# EAGLE board TSOC-FTDI-BASE-1-0 (EAGLE 6.6.0)
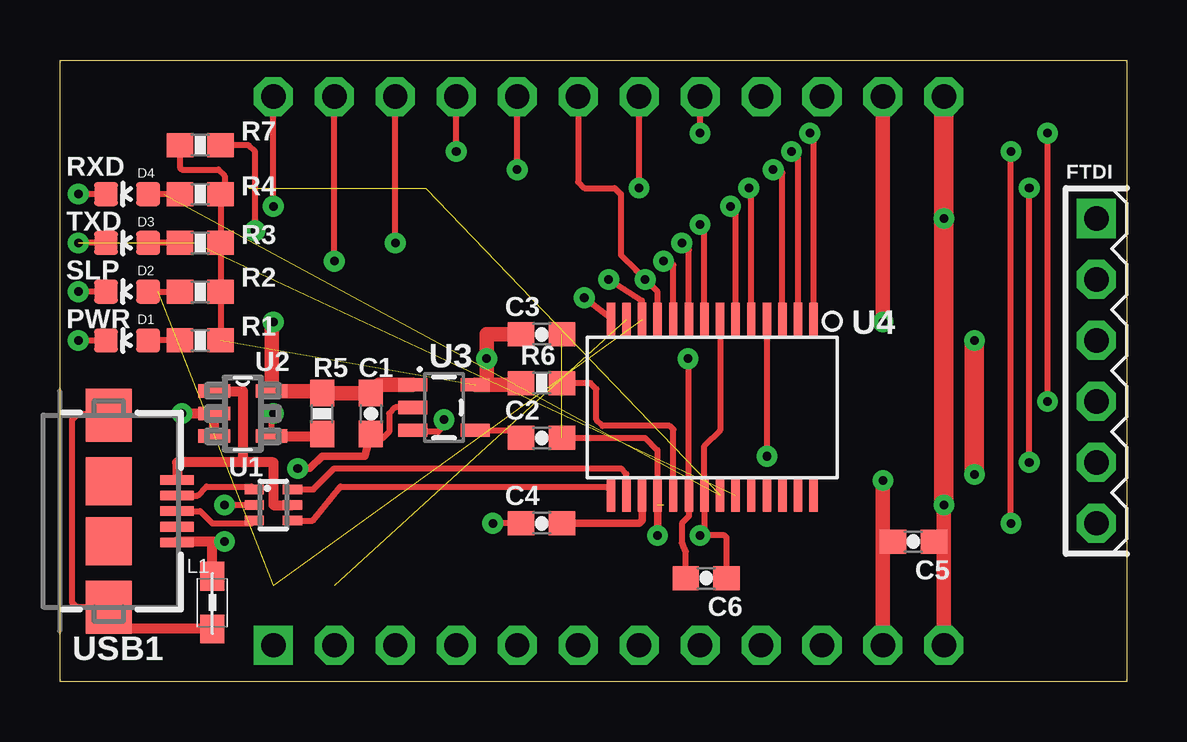
[diagram p0: board, top side]
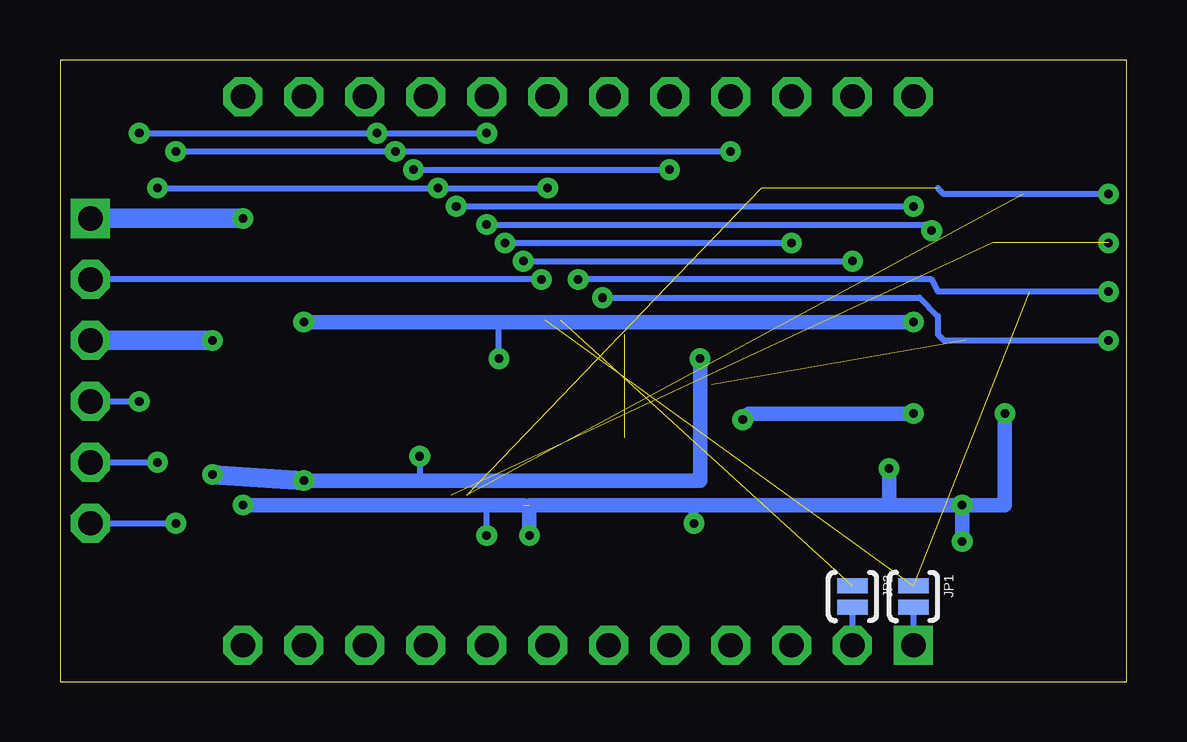
[diagram p1: board, bottom side, seen from below]

Size 44.45 x 25.91 mm. Coordinates in mm from the lower left corner, seen from the top.
Outline: 0,0 0,25.91 44.45,25.91 44.45,0 0,0
Copper layers (1*16): Top 0.035mm / dielectric 1.5mm / Bottom 0.035mm
Design rules "PatternAgents_7mil": minimum track width 7mil, minimum drill 14mil, track to track 7mil, track to pad 7mil, pad to pad 7mil, via to via 7mil, smd to smd 7mil, copper to edge 7mil, drill to drill 7mil, minimum pad ring 12mil, minimum via ring 10mil, stop-mask expansion 4mil, vias tented up to drill 25mil, thermal gap 7mil
Net classes: 1 vcc: width 0.254 mm

## Footprints (pad centres in the part's own frame; a part is rotated, then mirrored left to right if it is on the bottom)
0603-CAP = smd 1.1 x 1: 1 -0.85,0; 2 0.85,0
LED-0603 = smd 1 x 1: A 0,-0.877; C 0,0.877
PA_FTDI_M5X1 = drill 1.016 square: 1 -1.27,6.35 | drill 1.016 octagon: 2 -1.27,3.81; 3 -1.27,1.27; 4 -1.27,-1.27; 5 -1.27,-3.81; 6 -1.27,-6.35
JMP-2-NO = smd 0.635 x 1.27: 1 -0.45,0; 2 0.45,0
0805 = smd 1.2 x 1: 1 -1.1,0; 2 1.1,0
0603-RES = smd 1.1 x 1: 1 -0.85,0; 2 0.85,0
TSOC-BB-S24 = drill 1.016 square: 1B -11.43,-11.43 | drill 1.016 octagon: 1C -11.43,11.43; 2B -8.89,-11.43; 2C -8.89,11.43; 3B -6.35,-11.43; 3C -6.35,11.43; 4B -3.81,-11.43; 4C -3.81,11.43; 5B -1.27,-11.43; 5C -1.27,11.43; 6B 1.27,-11.43; 6C 1.27,11.43; 7B 3.81,-11.43; 7C 3.81,11.43; 8B 6.35,-11.43; 8C 6.35,11.43; 9B 8.89,-11.43; 9C 8.89,11.43; 10B 11.43,-11.43; 10C 11.43,11.43; 11B 13.97,-11.43; 11C 13.97,11.43; 12B 16.51,-11.43; 12C 16.51,11.43
SOT-363 = smd 0.4 x 0.8: 1 -0.65,-0.8; 2 0,-0.8; 3 0.65,-0.8; 4 0.65,0.8; 5 0,0.8; 6 -0.65,0.8
SOP95P275X110-5N = smd 1.321 x 0.559: 1 -1.194,0.94; 2 -1.194,0; 3 -1.194,-0.94; 4 1.194,-0.94; 5 1.194,0.94
SOT23-5 = smd 0.55 x 1.2: 1 -0.95,-1.3; 2 0,-1.3; 3 0.95,-1.3; 4 0.95,1.3; 5 -0.95,1.3
SSOP28DB = smd 0.348 x 1.397: 1 -4.225,-3.656; 2 -3.575,-3.656; 3 -2.925,-3.656; 4 -2.275,-3.656; 5 -1.625,-3.656; 6 -0.975,-3.656; 7 -0.325,-3.656; 8 0.325,-3.656; 9 0.975,-3.656; 10 1.625,-3.656; 11 2.275,-3.656; 12 2.925,-3.656; 13 3.575,-3.656; 14 4.225,-3.656; 15 4.225,3.656; 16 3.575,3.656; 17 2.925,3.656; 18 2.275,3.656; 19 1.625,3.656; 20 0.975,3.656; 21 0.325,3.656; 22 -0.325,3.656; 23 -0.975,3.656; 24 -1.625,3.656; 25 -2.275,3.656; 26 -2.925,3.656; 27 -3.575,3.656; 28 -4.225,3.656
USB-AB-MICRO-SMD = smd 1.4 x 0.4: D+ 2.85,0; D- 2.85,0.65; GND 2.85,-1.3; ID 2.85,-0.65; VBUS 2.85,1.3 | smd 1.9 x 2: P$6 0,1.25; P$7 0,-1.25 | smd 1.9 x 2.2: SHIELD1 0,4; SHIELD2 0,-4

## Placement (x,y rotation side)
C1  2.2uF  [0603-CAP]  12.95,11.18 270 top
C2  470pF  [0603-CAP]  20.07,10.16 0 top
C3  2.2uF  [0603-CAP]  20.07,14.48 0 top
C4  1.0uF  [0603-CAP]  20.07,6.6 0 top
C5  0.1uF  [0603-CAP]  35.56,5.84 180 top
C6  0.1uF  [0603-CAP]  26.92,4.32 180 top
D1  [LED-0603]  2.79,14.22 90 top
D2  [LED-0603]  2.79,16.26 90 top
D3  [LED-0603]  2.79,18.29 90 top
D4  [LED-0603]  2.79,20.32 90 top
FTDI  PA_FTDI_BASIC_HOST-  [PA_FTDI_M5X1]  44.45,12.95 0 top
JP1  [JMP-2-NO]  8.89,3.56 270 bottom
JP2  [JMP-2-NO]  11.43,3.56 270 bottom
L1  MH2029-300Y  [0805]  6.35,3.3 90 top
R1  1K  [0603-RES]  5.84,14.22 180 top
R2  1K  [0603-RES]  5.84,16.26 180 top
R3  1K  [0603-RES]  5.84,18.29 180 top
R4  1K  [0603-RES]  5.84,20.32 180 top
R5  10K  [0603-RES]  10.92,11.18 90 top
R6  10K  [0603-RES]  20.07,12.45 0 top
R7  10K  [0603-RES]  5.84,22.35 0 top
TSOC  TSOC-24-BB  [TSOC-BB-S24]  20.32,12.95 0 top
U1  NUF2221W1T2  [SOT-363]  8.89,7.37 270 top
U2  NCP361SNT1G  [SOP95P275X110-5N]  7.62,11.18 0 top
U3  MIC5219 3.3V  [SOT23-5]  16,11.43 270 top
U4  CY7C65213-28PVXI  [SSOP28DB]  27.18,11.43 180 top
USB1  USB_AB  [USB-AB-MICRO-SMD]  2.03,7.11 0 top

## Library data of the parts
C1-C6 R1-R7 = PatternAgents-ProtoPads
D1-D4 = SparkFun-LED
FTDI = PatternAgents-Interface
JP1 JP2 = PatternAgents-ProtoPads; BOM: EXCLUDE
L1 = wuerth-elektronik
TSOC = thingSoC
U1 = PatternAgents-OnSemi
U2 = PatternAgents-OnSemi; MPN: NCP361SNT1G; OC_FARNELL: 1642242; OC_NEWARK: 01P0135; PACKAGE: TSOP-5; SUPPLIER: ON Semiconductor
U3 = SparkFun-PowerIC; PROD_ID: VREG-09872
U4 = PatternAgents-Cypress
USB1 = BeeSafe

## Nets
3V3: C3.1 C5.2 FTDI.3 R1.1 R2.1 R3.1 R4.1 R6.1 R7.1 TSOC.11B U3.5 U4.4
5V0: C1.1 C6.2 R5.2 TSOC.11C U2.5 U3.1 U4.20
!ATN: TSOC.6B
!CS: TSOC.7B
!CTS: FTDI.2 TSOC.6C U4.11
!DCD: TSOC.2C U4.10
!DSR: TSOC.3C U4.9
!DTR: FTDI.6 TSOC.4C U4.2
!IRQ: TSOC.5B
!POWER: D1.C U4.14
!RI: TSOC.1C U4.6
!RST: R6.2 U4.19
!RTS: TSOC.5C U4.3
!RX_LED: D4.C U4.22
!SLEEP: D2.C JP1.1 U4.12
!TX_LED: D3.C U4.23
!USB_FAULT: R5.1 U2.4 U3.3
BCD0: U4.28
BCD1: U4.27
BLUE: D3.A R3.2
BUS_DET: R7.2 U4.8
BYPASS: C2.1 U3.4
GND [vcc]: C1.2 C2.2 C3.2 C4.1 C5.1 C6.1 FTDI.1 L1.2 TSOC.12B TSOC.12C U1.2 U2.2 U2.3 U3.2 U4.7 U4.18 U4.21 USB1.GND
GRN: D1.A R1.2
IO1: JP2.2 TSOC.2B
IO2: JP1.2 TSOC.1B
MISO: TSOC.9B
MOSI: TSOC.10B
RED: D2.A R2.2
RXD: FTDI.5 TSOC.7C U4.5
SCK: TSOC.8B
SCL: TSOC.9C
SDA: TSOC.10C
SS1: TSOC.4B
SS2: TSOC.3B
TXD: FTDI.4 TSOC.8C U4.1
TXDEN: JP2.1 U4.13
USB1_DM: U1.1 USB1.D-
USB1_DP: U1.3 USB1.D+
USB1_ID: USB1.ID
USB1_M: U1.6 U4.16
USB1_P: U1.4 U4.15
USB1_SHIELD: L1.1 USB1.SHIELD1 USB1.SHIELD2
USB1_VBUS: U1.5 U2.1 USB1.VBUS
VCCD: C4.2 U4.17
YEL: D4.A R4.2

## Tracks (layer width: path | path; a pad name or v marks a point on that pad's centre or on a via)
3V3  (via drill 0.36)  (1 unrouted)
  Top 0.254: U4.4 29.45,9.41 v29.46,9.4 | R7.1 4.99,21.42 5.08,21.34 6.6,21.34 6.86,21.08 6.86,20.49 R4.1 R3.1 R2.1 R1.1
  Top 0.61: R6.1 19.15,12.38 U3.5 17.71,12.38 17.78,12.45 v17.78,13.46 17.78,14.48 C3.1 | TSOC.11B 34.29,5.93 | 34.29,5.93 C5.2 | v34.29,8.38 34.29,5.93
  Top 0.813: v38.1,8.64 v38.1,14.22
  Bottom 0.254: v29.46,9.4 29.46,8.64 29.72,8.38
  Bottom 0.61: v17.78,13.46 17.78,8.38 29.72,8.38 v34.29,8.38
  Bottom 0.813: v34.29,8.38 v38.1,8.64 | v38.1,14.22 FTDI.3
5V0  (via drill 0.36)
  Top 0.254: v26.16,13.46 26.2,13.17 U4.20 26.2,6.9 25.91,6.6 25.91,5.84 26.07,5.42 C6.2
  Top 0.61: U3.1 13.31,12.38 C1.1 R5.2 10.83,12.12 U2.5 8.81,14.91 v8.89,14.99 | TSOC.11C v34.29,14.99
  Bottom 0.254: v26.16,13.46 26.16,14.73 25.91,14.99
  Bottom 0.61: v34.29,14.99 25.91,14.99 v8.89,14.99
!CTS  (via drill 0.36)
  Top 0.254: TSOC.6C 21.59,20.83 21.84,20.57 23.11,20.57 23.37,20.32 23.37,17.78 24,17.14 v24.38,16.76 24.9,16.25 U4.11
  Bottom 0.254: v24.38,16.76 FTDI.2
!DCD  (via drill 0.36)
  Top 0.254: U4.10 25.55,17.37 v25.15,17.53 | v11.43,17.53 TSOC.2C
  Bottom 0.254: v25.15,17.53 v11.43,17.53
!DSR  (via drill 0.36)
  Top 0.254: U4.9 26.2,17.99 v25.91,18.29 | v13.97,18.29 TSOC.3C
  Bottom 0.254: v25.91,18.29 v13.97,18.29
!DTR  (via drill 0.36)
  Top 0.254: U4.2 30.75,21.83 v30.48,22.1 | v16.51,22.1 TSOC.4C | v39.62,6.6 v39.62,22.1
  Bottom 0.254: v16.51,22.1 v30.48,22.1 v39.62,22.1 | FTDI.6 v39.62,6.6
!POWER  (via drill 0.36)
  Top 0.254: U4.14 22.95,15.15 v21.84,16 | v0.76,14.22 D1.C
  Bottom 0.254: v21.84,16 8.64,16 7.87,15.24 7.87,14.48 7.62,14.22 v0.76,14.22
!RI  (via drill 0.36)
  Top 0.254: U4.6 28.15,19.6 v27.94,19.81 | v8.89,19.81 TSOC.1C
  Bottom 0.254: v27.94,19.81 v8.89,19.81
!RST
  Top 0.254: U4.19 25.55,10.52 25.4,10.67 22.61,10.67 22.35,10.92 22.35,12.19 22.1,12.45 R6.2
!RTS  (via drill 0.36)
  Top 0.254: U4.3 30.1,21.2 v29.72,21.34 | v19.05,21.34 TSOC.5C
  Bottom 0.254: v29.72,21.34 v19.05,21.34
!RX_LED  (via drill 0.36)  (3 unrouted)
  Top 0.254: D4.C v0.76,20.32
  Bottom 0.254: v0.76,20.32 7.62,20.32 7.87,20.57
!SLEEP  (via drill 0.36)  (2 unrouted)
  Top 0.254: D2.C v0.76,16.26 | v22.86,16.76 24.25,15.88 U4.12
  Bottom 0.254: v0.76,16.26 7.87,16.26 8.13,16.76 v22.86,16.76
!TX_LED  (via drill 0.36)  (2 unrouted)
  Top 0.254: D3.C v0.76,18.29
!USB_FAULT  (via drill 0.36)
  Top 0.254: U2.4 8.81,11.1 v8.89,11.18 | v16,10.92 16,10.67 15.75,10.41 14.77,10.41 U3.3
  Top 0.406: U2.4 10.67,10.24 R5.1
  Bottom 0.254: 15.75,11.18 v16,10.92
  Bottom 0.61: v8.89,11.18 15.75,11.18
BLUE
  Top 0.254: R3.2 D3.A
BUS_DET  (via drill 0.36)
  Top 0.254: U4.8 26.85,18.87 v26.67,19.05 | v8.13,18.8 8.13,22.1 7.87,22.35 R7.2
  Bottom 0.254: v26.67,19.05 8.38,19.05 v8.13,18.8
BYPASS
  Top 0.254: U3.4 18.9,10.48 C2.1
GND  (via drill 0.36)  (2 unrouted)
  Top 0.254: U1.2 v6.86,7.37 | 4.88,5.84 USB1.GND | C4.1 v18.03,6.6 | U3.2 13.97,11.43 13.72,11.18 13.72,10.41 13.46,10.16 13.12,10.16 C1.2 | C2.2 24.38,10.16 24.89,9.65 24.89,7.79 U4.18 | U4.7 27.5,10.49 26.85,9.84 U4.21 26.85,6.28 v26.67,6.1 27.69,6.1 27.77,6.01 C6.1
  Top 0.305: U4.18 24.9,6.11 v24.89,6.1 | v9.91,8.89 10.41,8.89 10.92,9.4 12.7,9.4 C1.2
  Top 0.406: v6.86,5.84 6.35,5.84 | 6.35,5.84 4.88,5.84 | L1.2 6.35,5.84 | v5.08,11.18 U2.2 U2.3
  Top 0.61: TSOC.12B 36.83,5.84 | 36.83,5.84 v36.83,7.37 | C5.1 36.83,5.84
  Top 0.813: TSOC.12C v36.83,19.3 v36.83,7.37
  Bottom 0.254: v26.67,6.1 26.67,7.11 26.42,7.37
  Bottom 0.406: v18.03,6.6 18.03,7.37
  Bottom 0.61: v6.86,7.37 v6.86,5.84 | v9.91,8.89 9.91,7.37 | v6.86,7.37 5.08,7.37 v5.08,11.18 | 9.91,7.37 18.03,7.37 24.89,7.37 v24.89,6.1 | v6.86,7.37 9.91,7.37 | v36.83,7.37 26.42,7.37 25.16,7.37
  Bottom 0.813: FTDI.1 v36.83,19.3
GRN
  Top 0.254: R1.2 D1.A
IO1
  Bottom 0.254: JP2.2 TSOC.2B
IO2
  Bottom 0.254: JP1.2 TSOC.1B
RED
  Top 0.254: D2.A R2.2
RXD  (via drill 0.36)
  Top 0.254: U4.5 28.8,20.47 v28.7,20.57 | v24.13,20.57 TSOC.7C | v40.39,9.14 v40.39,20.57
  Bottom 0.254: v24.13,20.57 v28.7,20.57 v40.39,20.57 | FTDI.5 v40.39,9.14
TXD  (via drill 0.36)
  Top 0.254: U4.1 31.4,22.7 v31.24,22.86 | v26.67,22.86 TSOC.8C | v41.15,11.68 v41.15,22.86
  Bottom 0.254: v26.67,22.86 v31.24,22.86 v41.15,22.86 | FTDI.4 v41.15,11.68
TXDEN  (1 unrouted)
USB1_DM
  Top 0.254: USB1.D- 5.73,7.76 6.1,8.13 7.98,8.13 U1.1
USB1_DP
  Top 0.254: USB1.D+ 5.84,7.11 6.35,6.6 7.98,6.6 U1.3
USB1_M
  Top 0.254: U1.6 10.56,8.02 11.43,8.89 23.37,8.89 23.6,8.66 U4.16
USB1_P
  Top 0.254: U1.4 10.53,6.72 11.68,8.13 22.85,8.13 U4.15
USB1_SHIELD
  Top 0.254: USB1.SHIELD2 1.52,3.11 0.7,3.11 0.51,3.3 0.51,10.92 0.76,11.18 1.97,11.18 USB1.SHIELD1
  Top 0.406: 1.84,2.79 1.52,3.11 | L1.1 2.03,2.2 USB1.SHIELD2
USB1_VBUS
  Top 0.406: U1.5 8.89,7.37 8.89,9.14 7.62,9.14 | 7.62,9.14 4.88,9.14 USB1.VBUS | U2.1 7.62,12.12 7.62,9.14
VCCD
  Top 0.305: U4.17 24.25,6.73 24.13,6.6 C4.2
YEL
  Top 0.254: R4.2 D4.A

## Text on the board
tPlace: RXD | TXD | SLP | PWR